# Altium PCB 5V_Regulator.PcbDoc
Units mil, origin at the board's own origin, x right, y up, seen from the top; angles counter-clockwise.
Board outline 2758 x 1970 mil, 4 copper layers (Top Layer, MidLayer1, MidLayer2, Bottom Layer); 12 components, 10 nets, 37 pads, 68 vias.
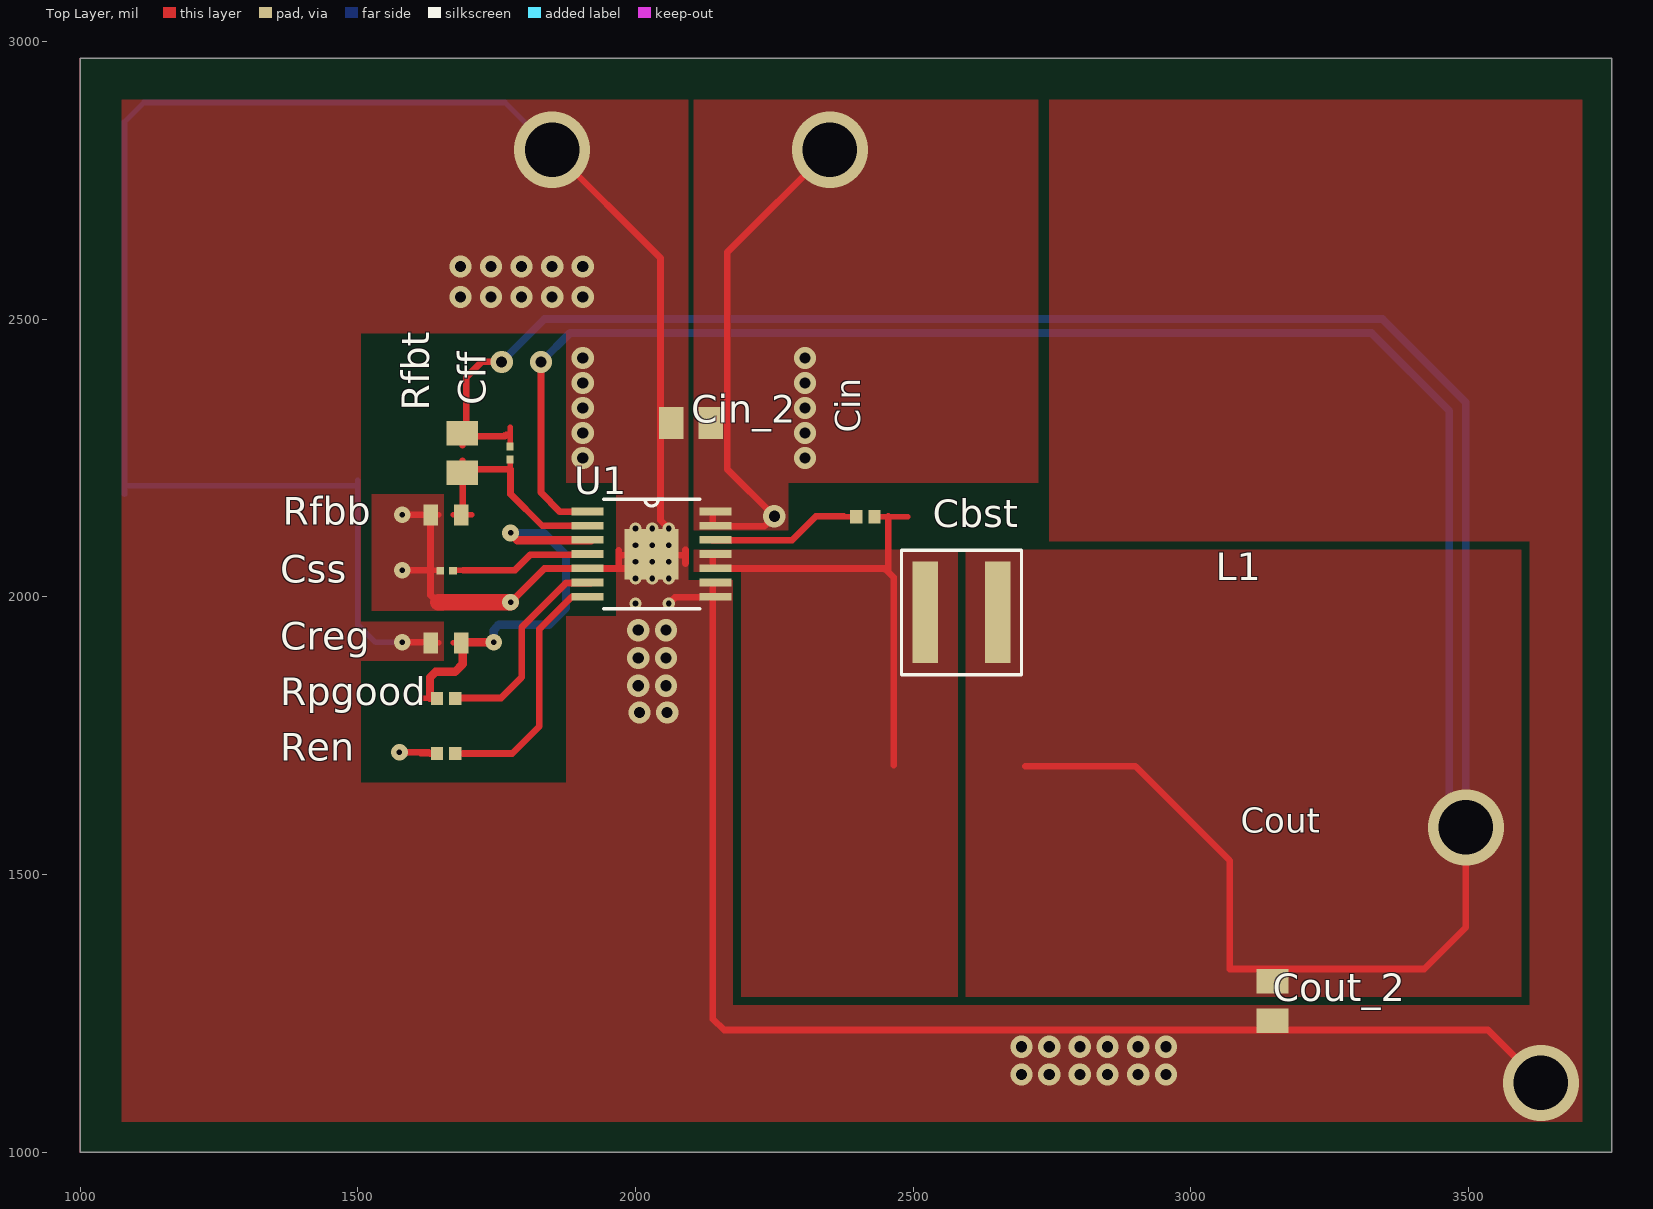
[diagram p0: Top Layer view]
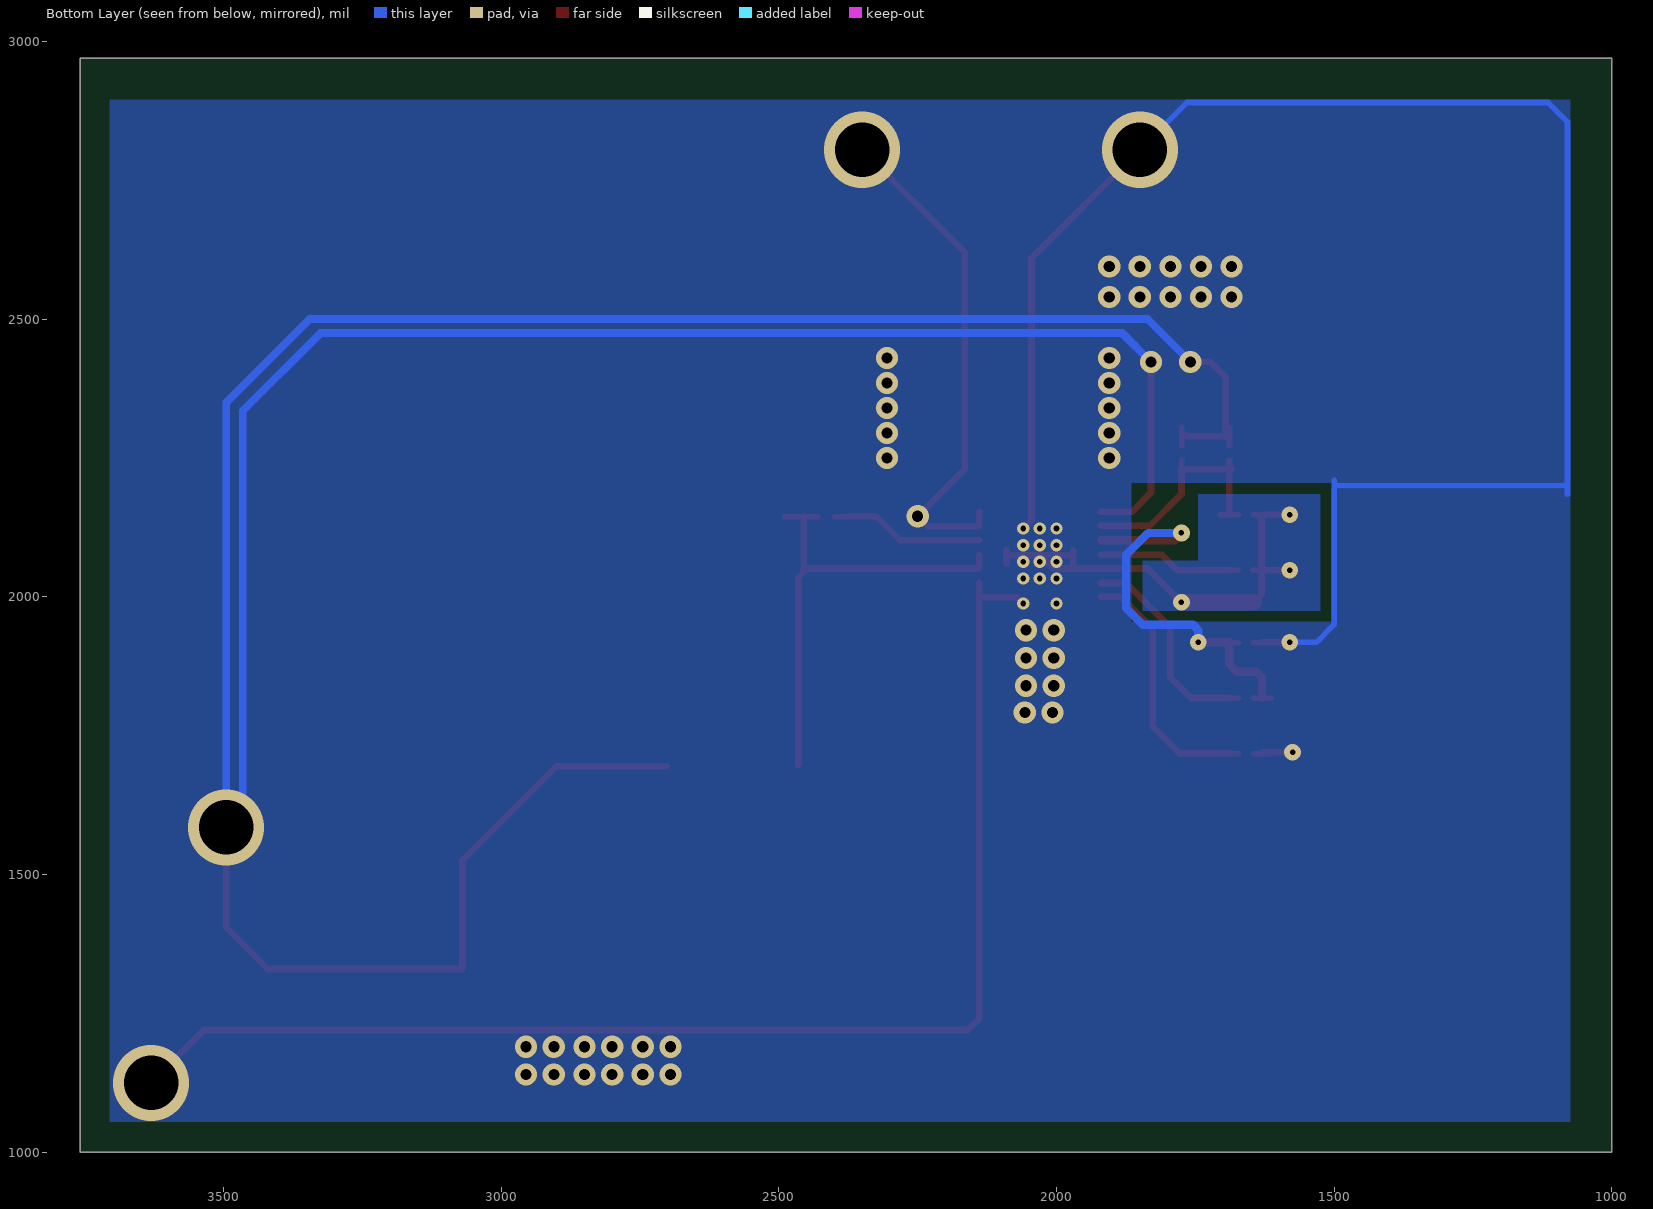
[diagram p1: Bottom Layer view, seen from below]
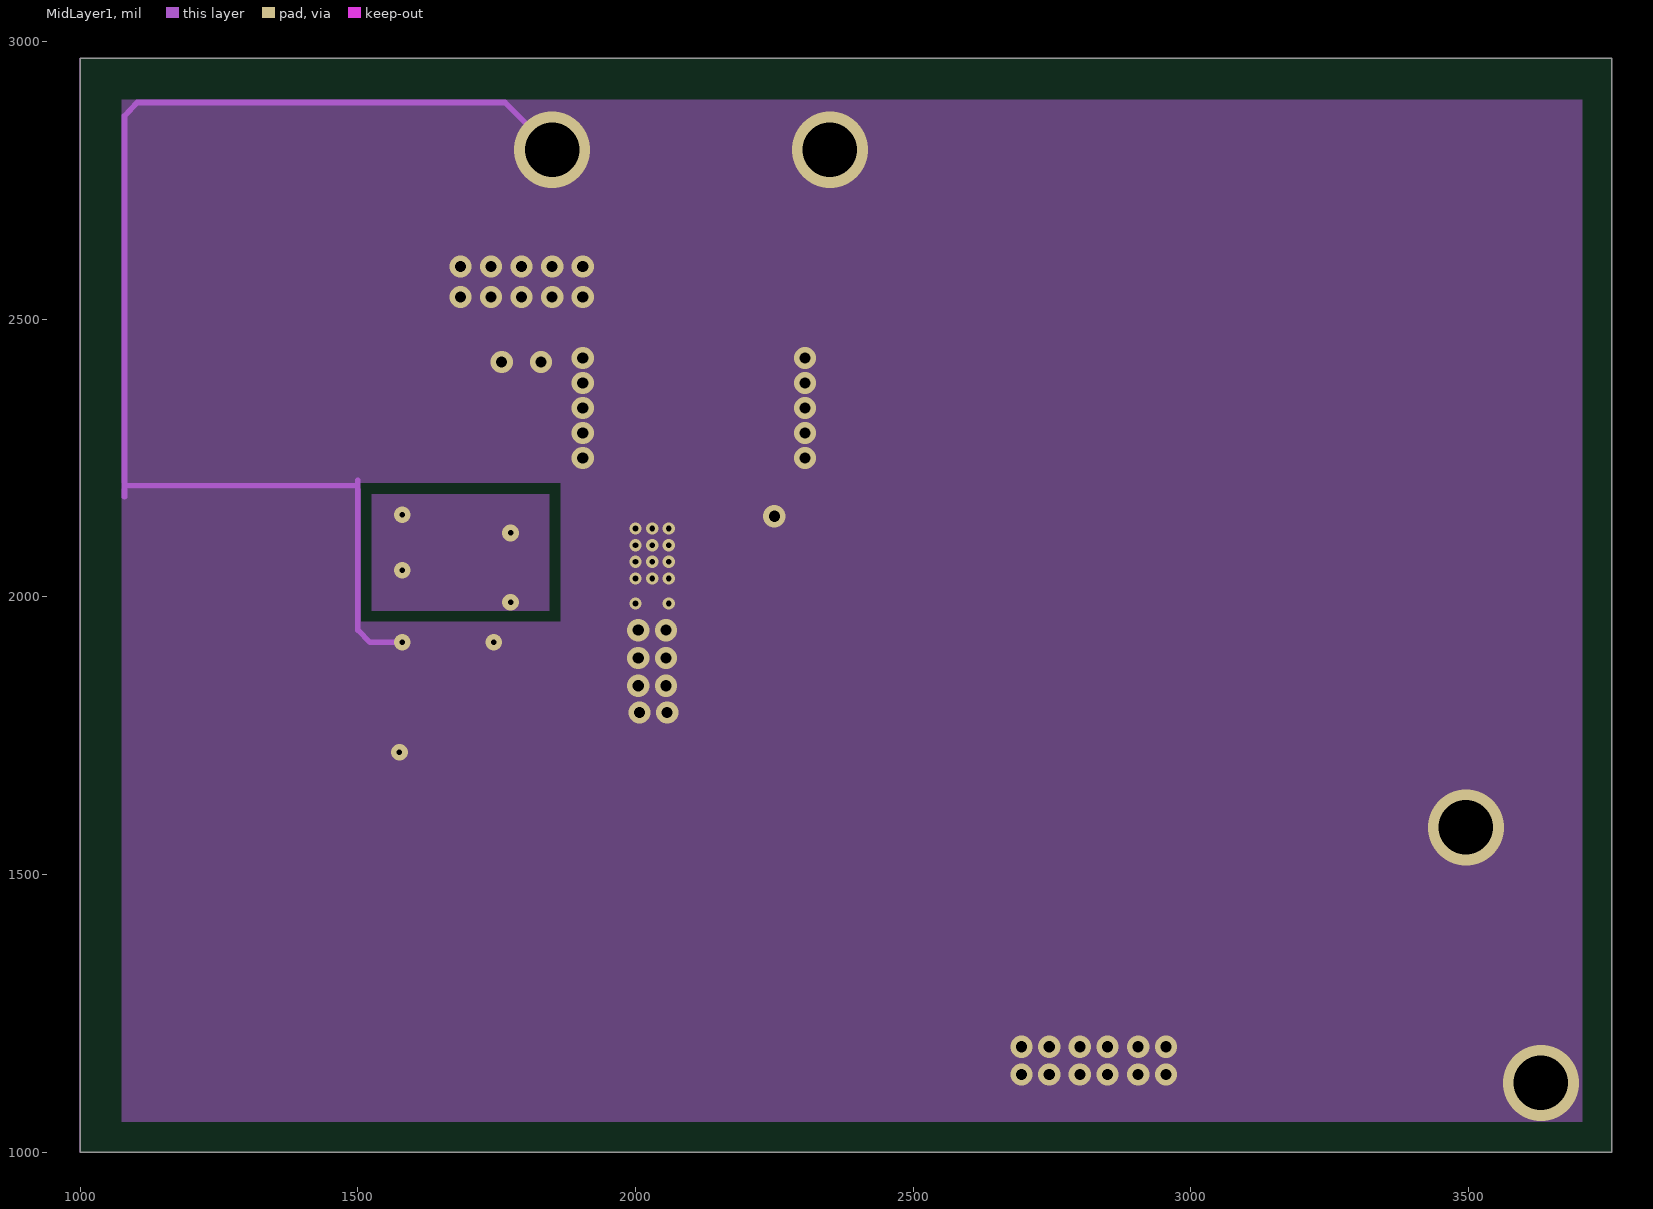
[diagram p2: MidLayer1]
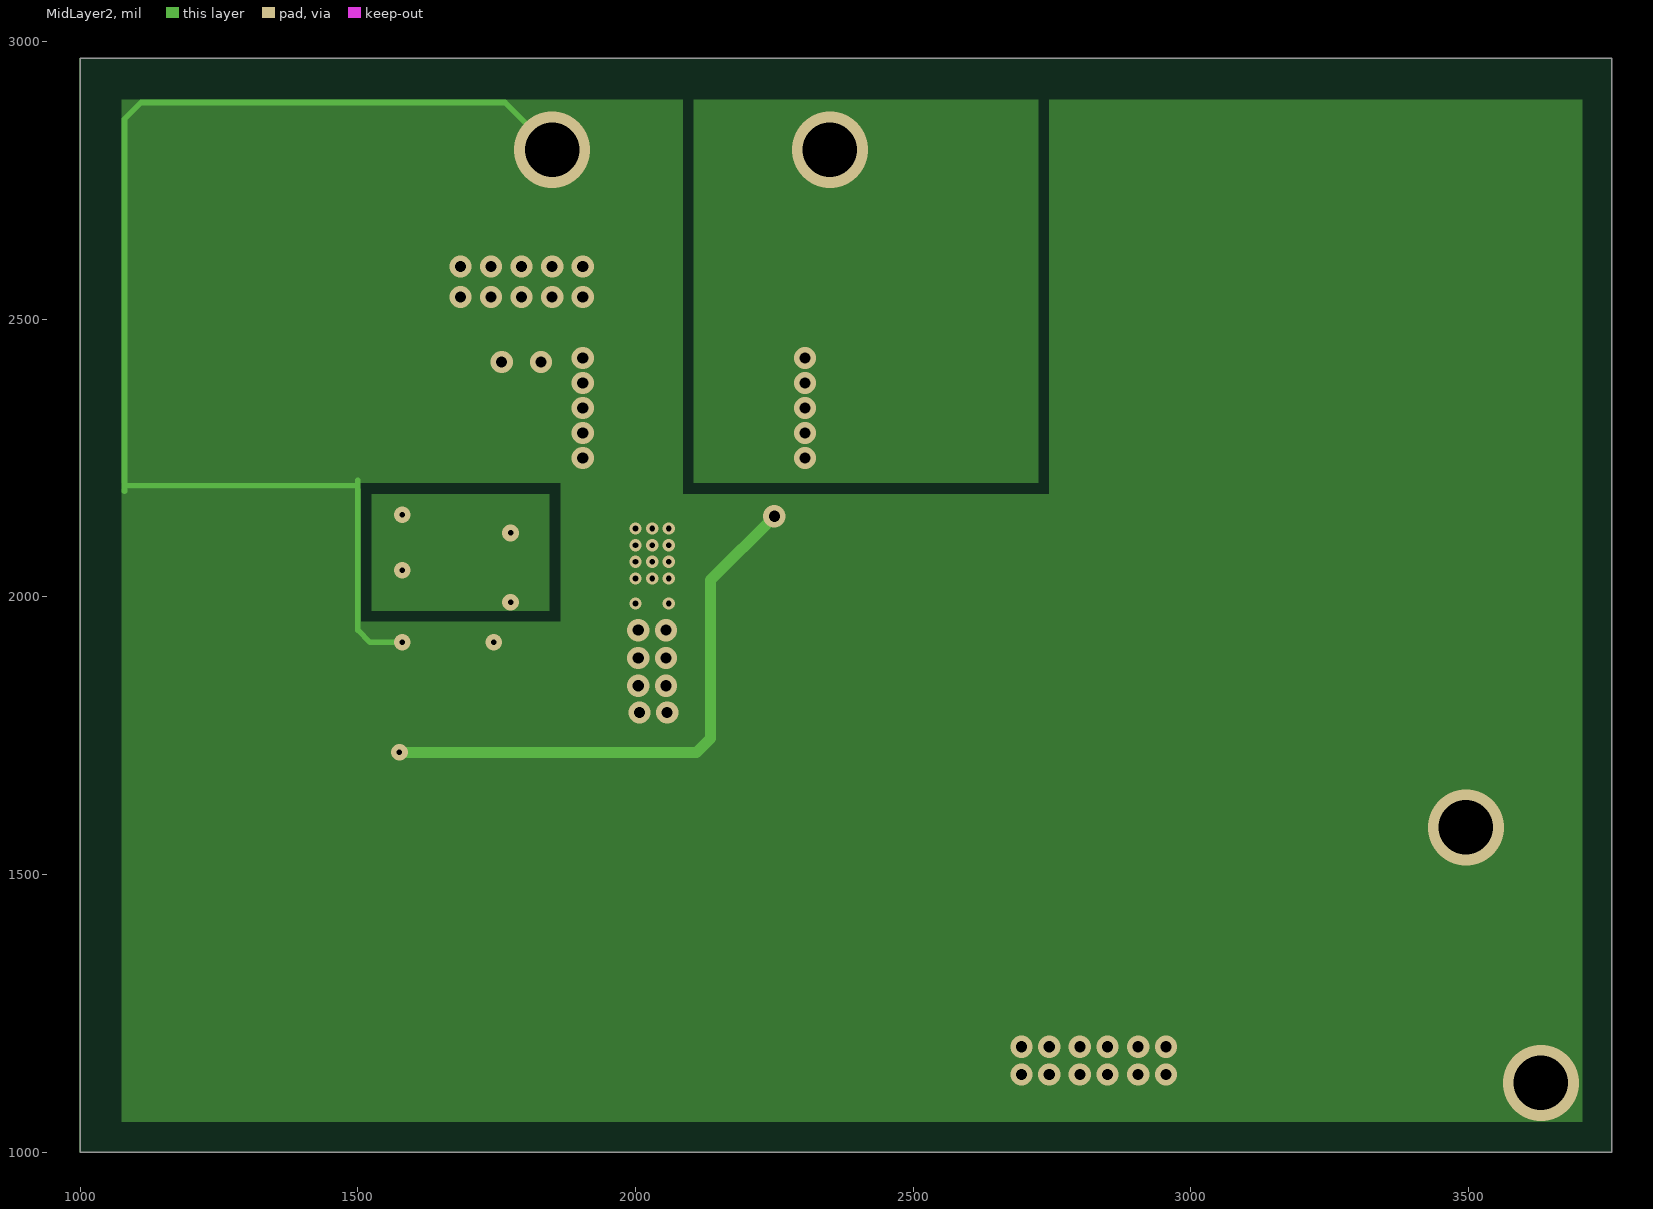
[diagram p3: MidLayer2]

## Layer stack, top to bottom
Top Solder: solder mask 0.4, Solder Resist, Dk 3.5
Top Layer: signal copper 1.4
Dielectric1: core 12.6, FR-4, Dk 4.8
MidLayer1: signal copper 1.4
Dielectric2: prepreg 12.6, FR-4, Dk 4.8
MidLayer2: signal copper 1.4
Dielectric3: core 12.6, FR-4, Dk 4.8
Bottom Layer: signal copper 1.4
Bottom Solder: solder mask 0.4, Solder Resist, Dk 3.5

## Board outline
1000,1000 3758,1000 3758,2970 1000,2970

## Design rules (kind name [scope] priority, off if disabled: settings)
Clearance [All] p1: gap=10 ignorepadtopadclearanceinfootprint=FALSE except(0: Arc-Hole Track-Hole SMDPad-Hole THPad-Hole Via-Hole Fill-Hole Poly-Hole Region-Hole Text-Hole)
PlaneConnect [All] p1: planeconnectstyle=Direct reliefexpansion=20 reliefentries=4 reliefconductorwidth=10 reliefairgap=10
PolygonConnect [All] p1: connectstyle=Direct reliefconductorwidth=10 reliefentries=4 polygonreliefangle="90 Angle" airgapwidth=10
RoomDefinition 5V_Regulator [InComponentClass('5V_Regulator')] p1: confinementstyle=ConfineIn formatcopy=TRUE lockcomponents=FALSE outline 0,0 2000,0 2000,1000 0,1000
RoutingVias [All] p1: holewidth=28 width=50 viastyle="Through Hole" minholewidth=28 minwidth=50 maxholewidth=28 maxwidth=50
SolderMaskExpansion [All] p1: expansion=4
Width [All] p1: maxlimit=10 minlimit=10 preferedwidth=10
29 further rules are at their usual default settings.

## Components (designator, comment, footprint, x,y, rotation, side; value= is the part's Value field where it differs from the comment)
Cbst "GRM155R61A104KA01D" 0402 2414,2144 r0 top value=100nF
Cff "GCM0335C1E100JD03D" 0201 1774,2259 r270 top value=10pF
Cin_2 "GRM21BR61C106KE15L" 0805 2100,2313 r180 top value=10uF
Cout_2 "LMK212BJ226MG-T" 0805 3147,1272 r270 top value=22uF
Creg "C0603C105Z8VACTU" 0603 1659,1917 r180 top value=1uF
Css "GRM033R61A822KA01D" 0201 1660,2047 r180 top value=8.2nF
L1 "XAL5030-332MEB" XAL5030 2587,1972 r0 top value=3.3uH
Ren "CRCW040210K5FKED" 0402 1659,1718 r180 top value=10.5k
Rfbb "RC0603FR-0724KL" 0603 1659,2147 r180 top value=24k
Rfbt "ERJ-6ENF1333V" 0805 1688,2259 r270 top value=133k
Rpgood "CRCW0402100KFKED" 0402 1659,1817 r180 top value=100k
U1 "TPS54526PWPR" R-PDSO-G14 2029,2077 r0 top value=N/A

## Footprints (in the part's own frame and the unit in brackets; to place one, negate y for a bottom-side part, rotate by r counter-clockwise, add the part's x,y. Pads: shape width x height; smd on the part's side, far side on the other; paste and mask are expansions set on the pad)
0201 [mil]
  rect 14x13 smd: 1(-11.5,0) 2(11.5,0)
0402 [mil]
  rect 22x24 smd: 1(-16.5,0) 2(16.5,0)
0603 [mil]
  rect 26x38 smd: 1(-27.5,0) 2(27.5,0)
0805 [mil]
  rect 44x57 smd: 1(-35.5,0) 2(35.5,0)
R-PDSO-G14 [mm]
  rect 1.461x0.351 smd: 1(-2.925,1.95) 2(-2.925,1.3) 3(-2.925,0.65) 4(-2.925,0) 5(-2.925,-0.65) 6(-2.925,-1.3) 7(-2.925,-1.95) 8(2.925,-1.95) 9(2.925,-1.3) 10(2.925,-0.65) 11(2.925,0) 12(2.925,0.65) 13(2.925,1.3) 14(2.925,1.95)
  rect 2.46x2.31 smd: 15(0,0)
  silkscreen extent -2.2,-2.5 2.2,2.5
XAL5030 [mil]
  rect 46x183 smd: 1(-65,0) 2(65,0)
  silkscreen extent -108,-112 108,112

## Part data
Cbst: "GRM155R61A104KA0", Manufacturer Name=MuRata, Manufacturer Part Number=GRM155R61A104KA01D, PackageReference=GRM155R61A104KA01D
Cff: "GCM0335C1E100JD0", Manufacturer Name=MuRata, Manufacturer Part Number=GCM0335C1E100JD03D, PackageReference=GCM0335C1E100JD03D
Cin_2: "GRM21BR61C106KE1", Manufacturer Name=MuRata, Manufacturer Part Number=GRM21BR61C106KE15L, PackageReference=GRM21BR61C106KE15L
Cout_2: Manufacturer Name="Taiyo Yuden", Manufacturer Part Number=LMK212BJ226MG-T, PackageReference=LMK212BJ226MG-T
Creg: Manufacturer Name=Kemet, Manufacturer Part Number=C0603C105Z8VACTU, PackageReference=C0603C105Z8VACTU
Css: "GRM033R61A822KA0", Manufacturer Name=MuRata, Manufacturer Part Number=GRM033R61A822KA01D, PackageReference=GRM033R61A822KA01D
L1: Manufacturer Name=Coilcraft, Manufacturer Part Number=XAL5030-332MEB, PackageReference=XAL5030-332MEB
Ren Rpgood: Manufacturer Name=Vishay-Dale
  Ren: Manufacturer Part Number=CRCW040210K5FKED, PackageReference=CRCW040210K5FKED
  Rpgood: Manufacturer Part Number=CRCW0402100KFKED, PackageReference=CRCW0402100KFKED
Rfbb: Manufacturer Name="Yageo America", Manufacturer Part Number=RC0603FR-0724KL, PackageReference=RC0603FR-0724KL
Rfbt: Manufacturer Name=Panasonic, Manufacturer Part Number=ERJ-6ENF1333V, PackageReference=ERJ-6ENF1333V
U1: Manufacturer Name="Texas Instruments", Manufacturer Part Number=TPS54526PWPR, PackageReference=TPS54526PWPR

## Via types
v1: diameter 40/40/40/40 (per signal layer), hole 20, Top Layer to Bottom Layer, 43 vias
v2: diameter 22/22/22/22 (per signal layer), hole 10, Top Layer to Bottom Layer, 14 vias
v3: diameter 30/30/30/30 (per signal layer), hole 10, Top Layer to Bottom Layer, 7 vias
v4: diameter 137/137/137/137 (per signal layer), hole 98, Top Layer to Bottom Layer, 4 vias

## Nets (pads, with @x,y where several pads share a name; then routed paths per layer and width w, separated by ;. In a path a pad name is that pad's centre, name@x,y a point inside that pad or via, vN(x,y) a via of type N, cw(c..) or ccw(c..) an arc to the next point about the centre after c; other vN are vias at no path point)
0: Cin_2.2 Cout_2.2 Creg.2 Css.2 Rfbb.2 U1.5 U1.8 U1.9 U1.15 | length 11008.1
  Top Layer w10: 1613,1917.5 1646,1917.5 ; 1613,2147.5 1630.5,2147.5 1646,2147.5 ; 1614,2047.5 1631,2047.5 Css.2@1647,2047.5
  Top Layer w12: v3(1580,1918) Creg.2@1630,1918 ; v3(1580,2048) 1631,2048 ; v3(1580,2148) 1630,2148 1630.5,2147.5 1631,2147 1631,2048 ; 1645,1990 1631,2003 1631,2047.5 1631,2048 ; v3@1775,1995 v3@1777,1997 ; v3@1780,1990 v3(1775,1990) 1836,2051 1975,2051 ; v4(1850,2805) 2045,2610 2045,2138 v2(2060,2123) ; 1970,2084 1970,2075 ; v2(2060,1988) 2071,1999 U1.8@2139,1999 ; 2089,2075 U1.15@2030,2075 ; 2090,2060 2090,2085 ; U1.9@2139,2025 U1.8@2139,1999 ; v4(3630,1125) 3535,1220 2160,1220 2139,1240 U1.8@2139,1999 ; 1970,2075 U1.15@2030,2075 ; 1970,2075 1970,2055 1975,2051 ; 1975,2051 2006,2051 U1.15@2030,2075
  Top Layer w30: 1645,1990 v3(1775,1990)
  MidLayer1 w10: 1080,2180 1080,2200 ; 1500,2210 1500,2200 ; v3(1580,1918) 1522,1918 1500,1940 1500,2200 ; v4(1850,2805) 1765,2890 1103,2890 1080,2866 1080,2200 ; 1080,2200 1500,2200
  MidLayer2 w10: 1080,2190 1080,2200 ; 1500,2210 1500,2200 ; v3(1580,1918) 1522,1918 1500,1940 1500,2200 ; v4(1850,2805) 1765,2890 1110,2890 1080,2860 1080,2200 ; 1080,2200 1500,2200
  Bottom Layer w10: 1080,2185 1080,2200 ; 1500,2210 1500,2200 ; v3(1580,1918) 1532,1918 1500,1950 1500,2200 ; v4(1850,2805) 1765,2890 1115,2890 1080,2855 1080,2200 ; 1080,2200 1500,2200
  other v1: 2695,1140 2745,1140 2800,1140 2850,1140 2905,1140 2955,1140 2695,1190 2745,1190 2800,1190 2850,1190 2905,1190 2955,1190 2007,1792 2057,1792 2005,1840 2055,1840 2005,1890 2055,1890 2005,1940 2055,1940 1905,2250 1905,2295 1905,2340 1905,2385 1905,2430 1685,2540 1740,2540 1795,2540 1850,2540 1905,2540 1685,2595 1740,2595 1795,2595 1850,2595 1905,2595
  other v2: 2000,1988 2000,2033 2030,2033 2060,2033 2000,2063 2030,2063 2060,2063 2000,2093 2030,2093 2060,2093 2000,2123 2030,2123
NetCbst_1: Cbst.1 U1.12 | length 314.8
  Top Layer w10: 2339,2144 Cbst.1 Cbst.1@2400,2144
  Top Layer w12: U1.12@2139,2102 2282,2102 2325,2145 2375,2145
NetCbst_2: Cbst.2 L1.1 U1.10 U1.11 | length 856.4
  Top Layer w10: Cbst.2@2429,2144 Cbst.2 2455,2144 2490,2144
  Top Layer w12: U1.11@2139,2076 2139,2051 2448,2051 2455,2045 ; 2455,2145 2455,2144 2455,2045 ; 2465,1697 2465,2035 2455,2045
NetCff_1: Cff.1 Cout_2.1 L1.2 Rfbt.1 U1.1 | length 7011.9
  Top Layer w10: 1688.5,2272 Rfbt.1@1688.5,2305 ; Cff.1@1774.5,2272 1774.5,2305
  Top Layer w12: v1(1759,2423) 1723,2423 1695,2395 1695,2289 1764,2289 1767,2292 ; v1@1829,2423 v1(1830,2423) 1830,2188 1864,2153 U1.1@1920,2153 ; 2702,1695 2900,1695 3070,1525 3070,1330 3420,1330 3495,1405 v4(3495,1585)
  Bottom Layer w14: v1(1759,2423) 1836,2500 3345,2500 3495,2350 v4(3495,1585) 3480,1585 3465,1600 3465,2335 3325,2475 1882,2475 v1(1830,2423)
NetCff_2: Cff.2 Rfbb.1 Rfbt.2 U1.2 | length 483.1
  Top Layer w10: 1672,2147.5 1705,2147.5 ; Rfbt.2@1688.5,2213 1688.5,2225.62 1688.5,2246 ; 1774.5,2213 1774.5,2225.5 Cff.2@1774.5,2246
  Top Layer w12: Rfbt.2@1685,2230 1688.5,2225.62 Rfbt.2@1689,2225 ; Rfbb.1@1689,2148 Rfbt.2@1689,2225 ; Rfbt.2@1689,2230 Rfbt.2@1689,2225 ; Rfbt.2@1695,2230 1770,2230 1774.5,2225.5 1775,2225 ; 1775,2230 1775,2225 ; U1.2@1920,2128 1832,2128 1775,2185 1775,2225
NetCin_1: Cin_2.1 Ren.2 U1.13 U1.14 | length 2023.1
  Top Layer w10: 1613,1717.5 Ren.2@1646,1717.5
  Top Layer w12: v3(1575,1720) 1628,1720 1630,1718 ; U1.14@2139,2153 2139,2127 2232,2127 v1(2250,2145) 2165,2230 2165,2620 v4(2350,2805)
  MidLayer2 w20: v3(1575,1720) 2110,1720 2135,1745 2135,2030 v1(2250,2145)
  other v1: 2305,2250 2305,2295 2305,2340 2305,2385 2305,2430
NetCreg_1: Creg.1 Rpgood.2 U1.3 | length 802.3
  Top Layer w10: 1613,1817.5 Rpgood.2@1646,1817.5 ; 1672,1917.5 1689,1917.5 1705,1917.5
  Top Layer w15: 1630,1818 1630,1855 1640,1865 1675,1865 1689,1879 1689,1917.5 1689,1918 1742,1918 v3@1745,1915 ; v3(1775,2115) 1787,2102 U1.3@1920,2102
  Bottom Layer w15: v3@1745,1915 v3(1745,1918) 1745,1940 1754,1950 1845,1950 1875,1980 1875,2075 1835,2115 v3(1775,2115)
NetCss_1: Css.1 U1.4 | length 274.6
  Top Layer w10: Css.1@1673,2047.5 1706,2047.5
  Top Layer w12: 1690,2048 1783,2048 1811,2076 U1.4@1920,2076
NetRen_1: Ren.1 U1.7 | length 483.3
  Top Layer w10: Ren.1@1672,1717.5 1705,1717.5
  Top Layer w12: 1689,1718 1778,1718 1827,1767 1827,1942 1885,2000 U1.7@1920,2000
NetRpgood_1: Rpgood.1 U1.6 | length 402.5
  Top Layer w10: Rpgood.1@1672,1817.5 1705,1817.5
  Top Layer w12: 1689,1818 1758,1818 1795,1855 1795,1945 1875,2025 U1.6@1920,2025

## Polygon pours and split planes (outlines as drawn)
no net on Top Overlay "Top Layer-No Net" (solid, remove dead copper): 2192.92,2058.91 2192.92,2043.91 2182.92,2043.91 2182.92,2058.91
no net on Top Paste "Top Layer-No Net" (solid, remove dead copper): 1980.57,2122.47 1980.57,2031.53 2077.43,2031.53 2077.43,2122.47
0 on Top Layer "Top Layer-No Net" (solid, pour order 9): 1075,1055 3705,1055 3705,2895 2745,2895 2745,2100 3610,2100 3610,1265 2175,1265 2175,2030 2095,2030 2095,2075 1965,2075 1965,1965 1875,1965 1875,1665 1505,1665 1505,1885 1655,1885 1655,1955 1505,1955 1505,2475 1875,2475 1875,2205 1965,2205 1965,2080 2095,2080 2095,2895 1075,2895
NetCin_1 on Top Layer "Top Layer-No Net" (solid, pour order 3): 2105,2120 2275,2120 2275,2205 2725,2205 2725,2895 2105,2895
NetCff_1 on Top Layer "Top Layer-No Net" (solid, pour order 1): 2595,1280 3595,1280 3595,2085 2595,2085
NetCbst_2 on Top Layer "Top Layer-No Net" (solid, pour order 2): 2105,2085 2580,2085 2580,1280 2190,1280 2190,2045 2105,2045
0 on Top Layer "Top Layer-No Net" (solid, pour order 8): 1525,2185 1525,1975 1655,1975 1655,2185
0 on Bottom Layer "Top Layer-No Net" (solid, pour order 11): 3705,1055 3705,2895 1075,2895 1075,2205 1865,2205 1865,1955 1505,1955 1505,2195 1075,2195 1075,1055
0 on Bottom Layer "Top Layer-No Net" (solid, pour order 10): 1525,2185 1745,2185 1745,2065 1845,2065 1845,1975 1525,1975
0 on MidLayer2 "Top Layer-No Net" (solid, pour order 5): 1075,1055 3705,1055 3705,2895 2745,2895 2745,2185 2085,2185 2085,2895 1075,2895 1075,2205 1865,2205 1865,1955 1505,1955 1505,2195 1075,2195
NetCin_1 on MidLayer2 "Top Layer-No Net" (solid, pour order 0): 2725,2205 2725,2895 2105,2895 2105,2205
0 on MidLayer2 "Top Layer-No Net" (solid, pour order 4): 1525,2185 1845,2185 1845,1975 1525,1975
0 on MidLayer1 "Top Layer-No Net" (solid, pour order 6): 3705,1055 3705,2895 1075,2895 1075,2205 1865,2205 1865,1955 1505,1955 1505,2195 1075,2195 1075,1055
0 on MidLayer1 "Top Layer-No Net" (solid, pour order 7): 1525,2185 1845,2185 1845,1975 1525,1975

## Other copper
Multi-Layer:
  lines w1: 1000,1000 1000,2969.7 3757.8,2969.7 3757.8,1000 1000,1000

## Silkscreen, mask and mechanical layers (free items; w line width, h text height)
Top Overlay:
  text "Cin" at 2405,2295 h45 r90
  text "Cout" at 3090,1575 h45